# EAGLE board SOT23_SOT323_SC75 (EAGLE 6.6.0)
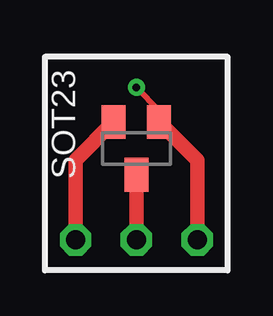
[diagram p0: board, top side]
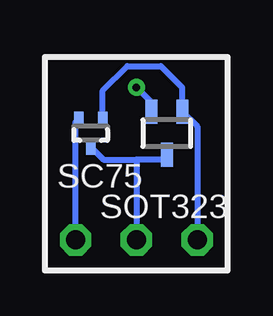
[diagram p1: board, bottom side, seen from below]

No outline drawn. Coordinates in mm, seen from the top.
Copper layers (1*16): Top 0.035mm / dielectric 1.5mm / Bottom 0.035mm
Design rules "default": minimum track width 10mil, minimum drill 0.6mm, track to track 8mil, track to pad 8mil, pad to pad 8mil, via to via 8mil, smd to smd 8mil, copper to edge 40mil, drill to drill 8mil, minimum pad ring 10mil, minimum via ring 8mil, stop-mask expansion 4mil, vias tented up to drill 0mil, thermal gap 10mil
Net classes: 1 pwr: width 0.254 mm

## Footprints (pad centres in the part's own frame; a part is rotated, then mirrored left to right if it is on the bottom)
SC75_INFINEON = smd 0.4 x 0.65: 1 -0.5,-0.575; 2 0,0.575; 3 0.5,-0.575
SOT323 = smd 0.5 x 1: 1 0,0.9; 2 -0.65,-0.9; 3 0.65,-0.9
SOT23B-3 = smd 1 x 1.4: 1 -0.95,-1.1; 2 0.95,-1.1; 3 0,1.1
1 = drill 0.8 octagon: P$1 0,0

## Placement (x,y rotation side)
E$59  [SC75_INFINEON]  5.71,5.71 180 bottom
E$81  [SOT323]  2.54,5.71 180 bottom
E$92  [SOT23B-3]  3.81,5.08 180 top
E$289  [1]  1.27,1.27 0 top
E$290  [1]  3.81,1.27 0 top
E$291  [1]  6.35,1.27 0 top

## Library data of the parts
E$59 E$81 E$92 = ref-packages
E$289-E$291 = drill

## Nets
S$125 [pwr]: E$59.2 E$81.1 E$92.3 E$290.P$1
S$127 [pwr]: E$59.1 E$81.2 E$92.2 E$289.P$1
S$128 [pwr]: E$59.3 E$81.3 E$92.1 E$291.P$1

## Tracks (layer width: path | path; a pad name or v marks a point on that pad's centre or on a via)
S$125
  Top 0.61: E$92.3 E$290.P$1
  Bottom 0.254: E$81.1 2.74,4.62 3.81,4.62 | 3.81,4.62 E$290.P$1 | E$59.2 5.19,4.62 3.81,4.62
S$127
  Top 0.61: E$92.2 1.27,4.59 E$289.P$1
  Bottom 0.254: E$289.P$1 1.27,6 E$81.2 1.91,6.63 1.91,7.62 2.79,8.51 4.19,8.51 5.21,7.49 E$59.1
S$128  (via drill 0.3)
  Top 0.254: v3.81,7.62 4.76,6.67 E$92.1
  Top 0.61: E$92.1 6.35,4.59 E$291.P$1
  Bottom 0.254: E$291.P$1 6.35,6.16 E$59.3 | E$81.3 3.19,7 v3.81,7.62

## Text on the board
tPlace: SOT23
bPlace: SC75 | SOT323